# EAGLE board Schematic.old (EAGLE 8.6.0), part 1 of 3
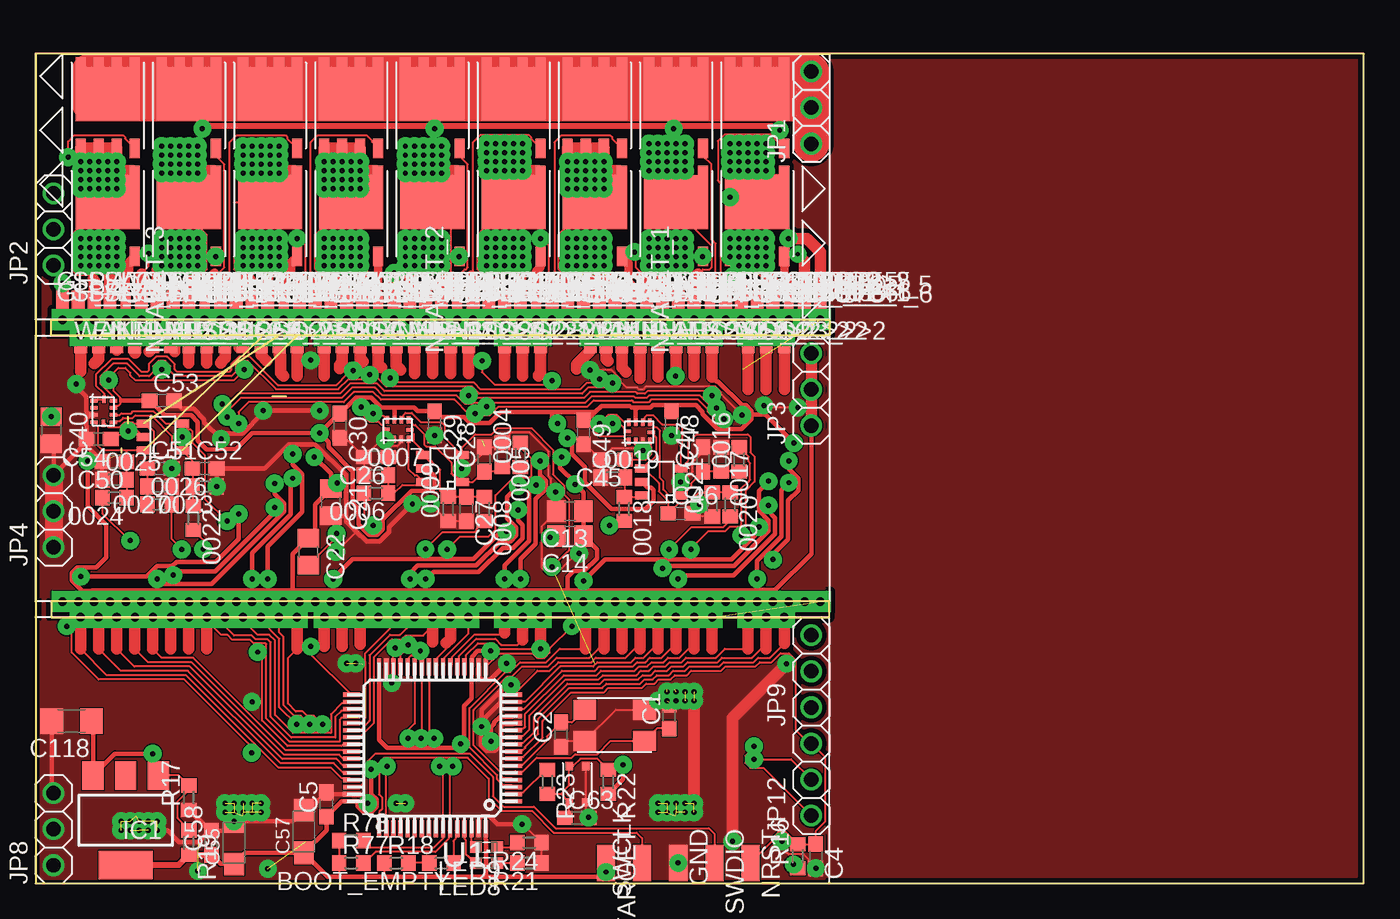
[diagram p0: board, top side]
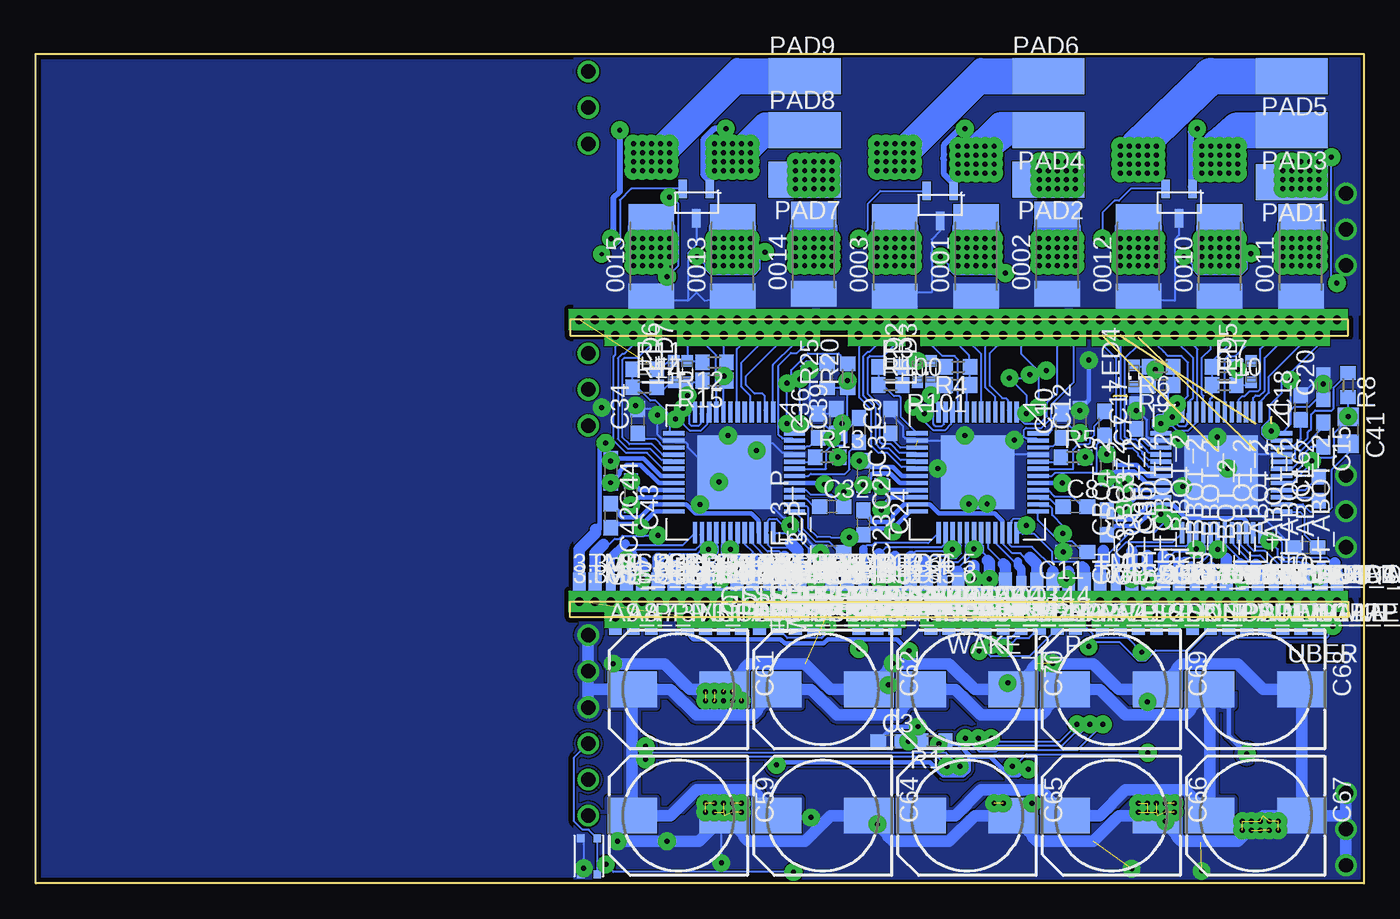
[diagram p1: board, bottom side, seen from below]

Size 93.52 x 58.41 mm. Coordinates in mm from the lower left corner, seen from the top.
Outline: 16.67,34.29 17.62,34.29
Outline: 6.03,30.64 6.03,30.32
Outline: 6.51,32.39 6.51,32.86
Outline: 0,0 93.48,0 93.52,58.4 0,58.41 0,0
Outline: 1.11,39.69 55.88,39.69 55.88,38.58 1.11,38.58 1.11,39.69
Outline: 1.11,19.84 1.11,18.73 55.88,18.73 55.88,19.84 1.11,19.84
Copper layers (1+2+15+16): Top 0.035mm / dielectric 0.2mm / Route2 0.017mm / dielectric 0.2mm / Route15 0.017mm / dielectric 0.2mm / Bottom 0.035mm
Design rules "default *": minimum track width 3.5mil, minimum drill 0.2mm, track to track 3.5mil, track to pad 3.5mil, pad to pad 3.5mil, via to via 5mil, smd to smd 3.5mil, copper to edge 6mil, drill to drill 6mil, minimum pad ring 3.5mil, minimum via ring 0.45mm, stop-mask expansion 4mil, vias tented up to drill 0mil, thermal gap 5mil
Milling: 3 lines

## Footprints (pad centres in the part's own frame; a part is rotated, then mirrored left to right if it is on the bottom)
R2512 = smd 1.8 x 3.2: 1 -2.8,0; 2 2.8,0
TP09SQ = smd 0.9 x 0.9: TP 0,0
R0603 = smd 1 x 1.1: 1 -0.85,0; 2 0.85,0
C0603 = smd 1.1 x 1: 1 -0.85,0; 2 0.85,0
C0805 = smd 1.3 x 1.5: 1 -0.95,0; 2 0.95,0
SMC_A = smd 1.6 x 1.4: + -1.5,0; - 1.5,0
150CLZ-0810 = smd 3.5 x 2.5: + 3.25,0; - -3.25,0
C1206 = smd 1.6 x 1.8: 1 -1.4,0; 2 1.4,0
TP07SQ = smd 0.7 x 0.7: TP 0,0
SMD1,27-2,54 = smd 1.27 x 2.54: 1 0,0
SOT223 = smd 1.5 x 2: 1 -2.3,-3.15; 2 0,-3.15; 3 2.3,-3.15 | smd 3.8 x 2: 4 0,3.15
1X03 = drill 1.016: 1 -2.54,0; 2 0,0; 3 2.54,0
SML0603 = smd 0.8 x 0.8: A 0.75,0; C -0.75,0
SMD2,54-5,08 = smd 2.54 x 5.08: 1 0,0
TQFP64 = smd 1.2 x 0.3: 1 -5.7,3.75; 2 -5.7,3.25; 3 -5.7,2.75; 4 -5.7,2.25; 5 -5.7,1.75; 6 -5.7,1.25; 7 -5.7,0.75; 8 -5.7,0.25; 9 -5.7,-0.25; 10 -5.7,-0.75; 11 -5.7,-1.25; 12 -5.7,-1.75; 13 -5.7,-2.25; 14 -5.7,-2.75; 15 -5.7,-3.25; 16 -5.7,-3.75; 33 5.7,-3.75; 34 5.7,-3.25; 35 5.7,-2.75; 36 5.7,-2.25; 37 5.7,-1.75; 38 5.7,-1.25; 39 5.7,-0.75; 40 5.7,-0.25; 41 5.7,0.25; 42 5.7,0.75; 43 5.7,1.25; 44 5.7,1.75; 45 5.7,2.25; 46 5.7,2.75; 47 5.7,3.25; 48 5.7,3.75 | smd 0.3 x 1.2: 17 -3.75,-5.7; 18 -3.25,-5.7; 19 -2.75,-5.7; 20 -2.25,-5.7; 21 -1.75,-5.7; 22 -1.25,-5.7; 23 -0.75,-5.7; 24 -0.25,-5.7; 25 0.25,-5.7; 26 0.75,-5.7; 27 1.25,-5.7; 28 1.75,-5.7; 29 2.25,-5.7; 30 2.75,-5.7; 31 3.25,-5.7; 32 3.75,-5.7; 49 3.75,5.7; 50 3.25,5.7; 51 2.75,5.7; 52 2.25,5.7; 53 1.75,5.7; 54 1.25,5.7; 55 0.75,5.7; 56 0.25,5.7; 57 -0.25,5.7; 58 -0.75,5.7; 59 -1.25,5.7; 60 -1.75,5.7; 61 -2.25,5.7; 62 -2.75,5.7; 63 -3.25,5.7; 64 -3.75,5.7
SUPER_DUPER_GUZICZEK = smd 0.57 x 0.55: T1 0,0; T2 2.55,0; T3 0,-1.16; T4 2.55,-1.16
S-PQFP-G48 = smd 0.3 x 1.5: 1-EN_GATE 0,0; 2-INHA 0.5,0; 3-INLA 1,0; 4-INHB 1.5,0; 5-INLB 2,0; 6-INHC 2.5,0; 7-INLC 3,0; 8-NFAULT 3.5,0; 9-NSCS 4,0; 10-SDI 4.5,0; 11-SDO 5,0; 12-SCLK 5.5,0; 25-GL_C 5.5,8.5; 26-SL_C 5,8.5; 27-SH_C 4.5,8.5; 28_GH_C 4,8.5; 29-GH_B 3.5,8.5; 30-SH_B 3,8.5; 31-SL_B 2.5,8.5; 32-GL_B 2,8.5; 33-GL_A 1.5,8.5; 34-SL_A 1,8.5; 35-SH_A 0.5,8.5; 36-GH_A 0,8.5 | smd 1.5 x 0.3: 13-PWRGD 7,1.5; 14-GND1 7,2; 15-AVDD 7,2.5; 16-SO1 7,3; 17-SO2 7,3.5; 18-SO3 7,4; 19-SN3 7,4.5; 20-SP3 7,5; 21-SN2 7,5.5; 22-SP2 7,6; 23-SN1 7,6.5; 24-SP1 7,7; 37-VCP_LSD -1.5,7; 38-VCPH -1.5,6.5; 39-CP2H -1.5,6; 40-CP2L -1.5,5.5; 41-PVDD -1.5,5; 42-CP1L -1.5,4.5; 43-CP1H -1.5,4; 44-VDRAIN -1.5,3.5; 45-GND2 -1.5,3; 46-DVDD -1.5,2.5; 47-WAKE -1.5,2; 48-VREG -1.5,1.5 | smd 5.17 x 5.17: POWERPAD 2.75,4.25
Q5B = smd 3.8 x 4.52: D1 0,-0.635 | smd 1.372 x 0.71: D2 -1.905,1.27; D3 -1.905,0; D4 -1.905,-1.27; D5 -1.905,-2.54; G 3.81,1.27; S1 3.81,0; S2 3.81,-1.27; S3 3.81,-2.54
X2QFN = smd 0.25 x 0.53: ADDR 0,0; AIN_0 1.5,0; AIN_2 1.5,1.35; AIN_3 1,1.35; GND 1,0; NC 0.5,0; SDA 0,1.35; VDD 0.5,1.35 | smd 0.53 x 0.25: AIN_1 1.6,0.65; SCL -0.1,0.7
SOT-23 = smd 1.3 x 0.6: GND 2.09,0.95; VDD 0,1.9; VOUT 0,0
SOT-23' = smd 0.55 x 1: 1 0,0; 2 0.95,0; 3 1.9,0; 4 1.9,2.7; 5 0.95,2.7; 6 0,2.7
SMD = smd 1.6 x 1.4: 1 0,2.2; 2 4.2,2.2; 3 4.2,0; 4 0,0

## Placement (x,y rotation side)
0001  5mohm  [R2512]  27.3,44.13 90 bottom
0002  5mohm  [R2512]  21.59,44.29 90 bottom
0003  5mohm  [R2512]  33.02,44.13 90 bottom
3.3V  TPTP09SQ  [TP09SQ]  47.62,37.78 0 top
3.3V1  TPTP09SQ  [TP09SQ]  55.24,40.48 0 top
3.3V2  TPTP09SQ  [TP09SQ]  55.24,20.64 0 bottom
3.3V3  TPTP09SQ  [TP09SQ]  55.24,41.28 0 top
3.3V4  TPTP09SQ  [TP09SQ]  55.24,21.43 0 bottom
3V3_P  TPTP09SQ  [TP09SQ]  47.62,17.94 0 bottom
0004  34.8kR  [R0603]  34.13,30.16 90 top
0005  4.99kR  [R0603]  32.86,30.16 270 top
0006  34.8kR  [R0603]  23.97,27.46 180 top
0007  4.99kR  [R0603]  23.97,28.73 0 top
0008  34.8kR  [R0603]  31.59,26.35 270 top
0009  4.99kR  [R0603]  29.05,26.35 90 top
0010  5mohm  [R2512]  10.16,44.13 90 bottom
0011  5mohm  [R2512]  4.45,44.13 90 bottom
0012  5mohm  [R2512]  15.88,44.13 90 bottom
0013  5mohm  [R2512]  44.45,44.13 90 bottom
0014  5mohm  [R2512]  38.73,44.29 90 bottom
0015  5mohm  [R2512]  50.16,44.13 90 bottom
0016  34.8kR  [R0603]  49.53,29.84 90 top
0017  4.99kR  [R0603]  48.26,29.84 270 top
0018  34.8kR  [R0603]  41.43,26.35 270 top
0019  4.99kR  [R0603]  40.64,28.58 0 top
0020  34.8kR  [R0603]  48.9,26.67 270 top
0021  4.99kR  [R0603]  47.62,26.67 90 top
0022  34.8kR  [R0603]  11.11,25.72 270 top
0023  4.99kR  [R0603]  11.91,27.94 180 top
0024  34.8kR  [R0603]  5.56,27.15 180 top
0025  4.99kR  [R0603]  5.56,28.42 0 top
0026  34.8kR  [R0603]  8.73,26.67 0 top
0027  4.99kR  [R0603]  8.73,27.94 180 top
A1_P  TPTP09SQ  [TP09SQ]  15.88,17.94 0 bottom
A2_P  TPTP09SQ  [TP09SQ]  17.14,17.94 0 bottom
A3_P  TPTP09SQ  [TP09SQ]  18.41,17.94 0 bottom
A4_P  TPTP09SQ  [TP09SQ]  33.02,17.94 0 bottom
A5_P  TPTP09SQ  [TP09SQ]  34.29,17.94 0 bottom
A6_P  TPTP09SQ  [TP09SQ]  35.56,17.94 0 bottom
A7_P  TPTP09SQ  [TP09SQ]  50.16,17.94 0 bottom
A8_P  TPTP09SQ  [TP09SQ]  51.44,17.94 0 bottom
A9_P  TPTP09SQ  [TP09SQ]  52.7,17.94 0 bottom
BOOT_EMPTY  0  [R0603]  28.57,1.43 180 top
C1  22pF  [C0603]  44.61,11.75 90 top
C2  22pF  [C0603]  36.99,10.48 90 top
C3  100nF  [C0603]  33.34,10 0 bottom
C4  100n  [C0603]  54.93,1.91 270 top
C5  100nF  [C0603]  20.48,5.56 90 top
C7  0.047uF  [C0603]  18.26,32.39 270 bottom
C8  0.047uF  [C0603]  20.32,26.51 0 bottom
C9  1uF/10V  [C0603]  33.34,32.54 90 bottom
C10  1uF/10V  [C0603]  21.27,32.23 90 bottom
C11  1uF/10V  [C0603]  20.32,23.34 180 bottom
C12  1uF  [C0603]  20,32.54 90 bottom
C13  4.7uF  [C0805]  37.62,26.19 180 top
C14  4.7uF  [C0805]  37.62,24.45 180 top
C15  0.047uF  [C0603]  2.86,31.59 270 bottom
C16  0.047uF  [C0603]  3.17,27.78 90 bottom
C17  1uF  [C0603]  16.03,32.86 90 bottom
C18  1uF  [C0603]  4.45,33.5 90 bottom
C19  1uF  [C0603]  4.13,23.65 180 bottom
C20  1uF  [C0603]  2.86,34.92 90 bottom
C21  4.7uF  [C0805]  20.8,26.83 270 top
C22  4.7uF  [C0805]  19.21,23.34 270 top
C23  1000pF  [C0603]  35.24,25.4 270 bottom
C24  1000pF  [C0603]  33.97,27.15 270 bottom
C25  1000pF  [C0603]  35.24,28.89 270 bottom
C26  0.1uf  [C0603]  23.97,30 180 top
C27  0.1uf  [C0603]  30.32,26.35 270 top
C28  0.1uf  [C0603]  31.59,29.84 90 top
C29  0.1uf  [C0603]  28.1,32.39 270 top
C30  0.1uf  [C0603]  21.43,32.23 270 top
C31  0.047uF  [C0603]  35.56,31.91 270 bottom
C32  0.047uF  [C0603]  37.47,26.51 0 bottom
C33  1000pF  [C0603]  18.1,25.4 270 bottom
C34  1uF  [C0603]  51.12,32.54 90 bottom
C35  1000pF  [C0603]  16.83,27.3 270 bottom
C36  1uF  [C0603]  38.42,32.23 90 bottom
C37  1000pF  [C0603]  18.1,29.37 270 bottom
C38  1uF  [C0603]  37.47,23.34 180 bottom
C39  1uF  [C0603]  37.15,32.54 90 bottom
C40  4.7uF  [C0805]  1.11,31.91 270 top
C41  4.7uF  [C0805]  1.11,31.91 270 bottom
C42  1000pF  [C0603]  53.02,25.88 270 bottom
C43  1000pF  [C0603]  51.59,27.46 270 bottom
C44  1000pF  [C0603]  53.02,29.05 270 bottom
C45  0.1uf  [C0603]  40.64,29.84 180 top
C46  0.1uf  [C0603]  45.4,26.03 0 top
C47  0.1uf  [C0603]  46.99,29.84 90 top
C48  0.1uf  [C0603]  44.77,32.39 270 top
C49  0.1uf  [C0603]  38.58,31.75 270 top
C50  0.1uf  [C0603]  5.56,29.69 180 top
C51  0.1uf  [C0603]  8.73,29.21 0 top
C52  0.1uf  [C0603]  11.91,29.21 0 top
C53  0.1uf  [C0603]  8.89,33.97 0 top
C54  0.1uf  [C0603]  4.45,31.27 180 top
C55  10uF  [SMC_A]  13.97,2.86 90 top
C57  10uF  [SMC_A]  18.89,3.65 90 top
C58  100nF  [C0603]  12.38,2.86 90 top
C59  220uf  [150CLZ-0810]  48.26,4.76 180 bottom
C61  220uf  [150CLZ-0810]  48.26,13.65 180 bottom
C62  220uf  [150CLZ-0810]  38.1,13.65 180 bottom
C63  100nF  [C0603]  38.1,4.6 0 top
C64  220uf  [150CLZ-0810]  38.1,4.76 180 bottom
C65  220uf  [150CLZ-0810]  27.94,4.76 180 bottom
C66  220uf  [150CLZ-0810]  17.78,4.76 180 bottom
C67  220uf  [150CLZ-0810]  7.62,4.76 180 bottom
C68  220uf  [150CLZ-0810]  7.62,13.65 180 bottom
C69  220uf  [150CLZ-0810]  17.78,13.65 180 bottom
C70  220uf  [150CLZ-0810]  27.94,13.65 180 bottom
C118  10uF  [C1206]  2.54,11.43 180 top
EN_GATE_MID_1  TPTP09SQ  [TP09SQ]  40.16,37.78 0 top
EN_GATE_MID_2  TPTP09SQ  [TP09SQ]  21.59,37.78 0 top
EN_GATE_MID_3  TPTP09SQ  [TP09SQ]  4.45,37.78 0 top
ENGATE_1_P  TPTP09SQ  [TP09SQ]  4.45,17.94 0 bottom
ENGATE_2_P  TPTP09SQ  [TP09SQ]  21.59,17.94 0 bottom
ENGATE_3_P  TPTP09SQ  [TP09SQ]  40.01,17.94 90 bottom
GH_ABOT_1  TPTP09SQ  [TP09SQ]  1.91,20.64 0 bottom
GH_ABOT_2  TPTP09SQ  [TP09SQ]  1.91,21.43 90 bottom
GH_ABOT_3  TPTP09SQ  [TP09SQ]  19.68,20.64 180 bottom
GH_ABOT_4  TPTP09SQ  [TP09SQ]  19.68,21.43 180 bottom
GH_ABOT_5  TPTP09SQ  [TP09SQ]  37.47,21.43 0 bottom
GH_ABOT_6  TPTP09SQ  [TP09SQ]  37.47,20.64 0 bottom
GH_ATOP_1  TPTP09SQ  [TP09SQ]  1.91,40.48 0 top
GH_ATOP_2  TPTP09SQ  [TP09SQ]  1.91,41.28 0 top
GH_ATOP_3  TPTP09SQ  [TP09SQ]  19.68,41.28 0 top
GH_ATOP_4  TPTP09SQ  [TP09SQ]  19.68,40.48 0 top
GH_ATOP_5  TPTP09SQ  [TP09SQ]  37.47,41.28 0 top
GH_ATOP_6  TPTP09SQ  [TP09SQ]  37.47,40.48 0 top
GH_BBOT_1  TPTP07SQ  [TP07SQ]  11.91,20.64 0 bottom
GH_BBOT_2  TPTP07SQ  [TP07SQ]  11.91,21.27 90 bottom
GH_BBOT_3  TPTP07SQ  [TP07SQ]  29.69,20.64 180 bottom
GH_BBOT_4  TPTP07SQ  [TP07SQ]  29.69,21.27 180 bottom
GH_BBOT_5  TPTP07SQ  [TP07SQ]  47.47,21.27 0 bottom
GH_BBOT_6  TPTP07SQ  [TP07SQ]  47.47,20.64 0 bottom
GH_BTOP_1  TPTP07SQ  [TP07SQ]  11.91,40.48 0 top
GH_BTOP_2  TPTP07SQ  [TP07SQ]  11.91,41.12 0 top
GH_BTOP_3  TPTP07SQ  [TP07SQ]  29.69,40.48 0 top
GH_BTOP_4  TPTP07SQ  [TP07SQ]  29.69,41.12 0 top
GH_BTOP_5  TPTP07SQ  [TP07SQ]  47.47,40.48 0 top
GH_BTOP_6  TPTP07SQ  [TP07SQ]  47.47,41.12 0 top
GH_CBOT_1  TPTP09SQ  [TP09SQ]  13.02,20.64 0 bottom
GH_CBOT_2  TPTP09SQ  [TP09SQ]  13.02,21.43 90 bottom
GH_CBOT_3  TPTP09SQ  [TP09SQ]  30.8,21.43 180 bottom
GH_CBOT_4  TPTP09SQ  [TP09SQ]  30.8,20.64 180 bottom
GH_CBOT_5  TPTP09SQ  [TP09SQ]  48.58,20.64 0 bottom
GH_CBOT_6  TPTP09SQ  [TP09SQ]  48.58,21.43 0 bottom
GH_CTOP_1  TPTP09SQ  [TP09SQ]  13.02,40.48 0 top
GH_CTOP_2  TPTP09SQ  [TP09SQ]  13.02,41.28 0 top
GH_CTOP_3  TPTP09SQ  [TP09SQ]  30.8,41.28 0 top
GH_CTOP_4  TPTP09SQ  [TP09SQ]  30.8,40.48 0 top
GH_CTOP_5  TPTP09SQ  [TP09SQ]  48.58,41.28 0 top
GH_CTOP_6  TPTP09SQ  [TP09SQ]  48.58,40.48 0 top
GL_ABOT_1  TPTP07SQ  [TP07SQ]  6.35,20.64 0 bottom
GL_ABOT_2  TPTP07SQ  [TP07SQ]  6.35,21.27 90 bottom
GL_ABOT_3  TPTP07SQ  [TP07SQ]  24.13,20.64 180 bottom
GL_ABOT_4  TPTP07SQ  [TP07SQ]  24.13,21.27 180 bottom
GL_ABOT_5  TPTP07SQ  [TP07SQ]  41.91,21.27 0 bottom
GL_ABOT_6  TPTP07SQ  [TP07SQ]  41.91,20.64 0 bottom
GL_ATOP_1  TPTP07SQ  [TP07SQ]  6.35,40.48 0 top
GL_ATOP_2  TPTP07SQ  [TP07SQ]  6.35,41.12 0 top
GL_ATOP_3  TPTP07SQ  [TP07SQ]  24.13,41.12 0 top
GL_ATOP_4  TPTP07SQ  [TP07SQ]  24.13,40.48 0 top
GL_ATOP_5  TPTP07SQ  [TP07SQ]  41.91,41.12 0 top
GL_ATOP_6  TPTP07SQ  [TP07SQ]  41.91,40.48 0 top
GL_BBOT_1  TPTP09SQ  [TP09SQ]  7.46,20.64 0 bottom
GL_BBOT_2  TPTP09SQ  [TP09SQ]  7.46,21.43 90 bottom
GL_BBOT_3  TPTP09SQ  [TP09SQ]  25.24,20.64 180 bottom
GL_BBOT_4  TPTP09SQ  [TP09SQ]  25.24,21.43 180 bottom
GL_BBOT_5  TPTP09SQ  [TP09SQ]  43.02,21.43 0 bottom
GL_BBOT_6  TPTP09SQ  [TP09SQ]  43.02,20.64 0 bottom
GL_BTOP_1  TPTP09SQ  [TP09SQ]  7.46,40.48 0 top
GL_BTOP_2  TPTP09SQ  [TP09SQ]  7.46,41.28 0 top
GL_BTOP_3  TPTP09SQ  [TP09SQ]  25.24,41.28 0 top
GL_BTOP_4  TPTP09SQ  [TP09SQ]  25.24,40.48 0 top
GL_BTOP_5  TPTP09SQ  [TP09SQ]  43.02,40.48 0 top
GL_BTOP_6  TPTP09SQ  [TP09SQ]  43.02,41.28 0 top
GL_CBOT_1  TPTP07SQ  [TP07SQ]  17.46,20.64 0 bottom
GL_CBOT_2  TPTP07SQ  [TP07SQ]  17.46,21.27 90 bottom
GL_CBOT_3  TPTP07SQ  [TP07SQ]  35.24,20.64 180 bottom
GL_CBOT_4  TPTP07SQ  [TP07SQ]  35.24,21.27 180 bottom
GL_CBOT_5  TPTP07SQ  [TP07SQ]  53.02,21.27 0 bottom
GL_CBOT_6  TPTP07SQ  [TP07SQ]  53.02,20.64 0 bottom
GL_CTOP_1  TPTP07SQ  [TP07SQ]  17.46,40.48 0 top
GL_CTOP_2  TPTP07SQ  [TP07SQ]  17.46,41.12 0 top
GL_CTOP_3  TPTP07SQ  [TP07SQ]  35.24,41.12 0 top
GL_CTOP_4  TPTP07SQ  [TP07SQ]  35.24,40.48 0 top
GL_CTOP_5  TPTP07SQ  [TP07SQ]  53.02,41.12 0 top
GL_CTOP_6  TPTP07SQ  [TP07SQ]  53.02,40.48 0 top
GND  WIREPADSMD1,27-254  [SMD1,27-2,54]  45.24,1.43 180 top
IC1  LM317MBSTT3  [SOT223]  6.35,4.45 180 top
INH_A_2>  TPTP09SQ  [TP09SQ]  5.71,37.78 0 top
INH_A_2>1  TPTP09SQ  [TP09SQ]  25.4,37.78 0 top
INH_A_2>2  TPTP09SQ  [TP09SQ]  41.27,37.78 0 top
INH_B_2>  TPTP09SQ  [TP09SQ]  6.99,37.78 0 top
INH_B_2>1  TPTP09SQ  [TP09SQ]  26.67,37.78 0 top
INH_B_2>2  TPTP09SQ  [TP09SQ]  42.55,37.78 0 top
INH_C_2>  TPTP09SQ  [TP09SQ]  8.26,37.78 0 top
INH_C_2>1  TPTP09SQ  [TP09SQ]  27.94,37.78 0 top
INH_C_2>2  TPTP09SQ  [TP09SQ]  43.81,37.78 0 top
JP1  [1X03]  54.61,54.61 90 top
JP2  [1X03]  1.27,46.04 90 top
JP3  [1X03]  54.61,34.77 90 top
JP4  [1X03]  1.27,26.19 90 top
JP8  [1X03]  1.27,3.81 90 top
JP9  [1X03]  54.61,14.92 90 top
JP12  [1X03]  54.61,7.3 90 top
LED2  Green  [SML0603]  31.43,36.04 90 bottom
LED3  Red  [SML0603]  30.48,36.04 90 bottom
LED4  Green  [SML0603]  16.19,35.72 90 bottom
LED5  Red  [SML0603]  7.94,36.04 90 bottom
LED6  Green  [SML0603]  48.58,36.04 90 bottom
LED7  Red  [SML0603]  47.62,36.04 90 bottom
LED8  Red  [SML0603]  31.75,1.43 180 top
LED9  Red  [SML0603]  31.75,2.54 180 top
NFAULT_1  TPTP09SQ  [TP09SQ]  45.09,37.78 90 top
NFAULT_1_P  TPTP09SQ  [TP09SQ]  9.53,17.94 0 bottom
NFAULT_2  TPTP09SQ  [TP09SQ]  29.21,37.78 90 top
NFAULT_2_P  TPTP09SQ  [TP09SQ]  29.21,17.94 0 bottom
NFAULT_3  TPTP09SQ  [TP09SQ]  9.53,37.78 90 top
NFAULT_3_P  TPTP09SQ  [TP09SQ]  45.09,17.94 0 bottom
NRST  WIREPADSMD1,27-254  [SMD1,27-2,54]  50.32,1.43 180 top
NSCS_1_P  TPTP09SQ  [TP09SQ]  10.79,17.94 0 bottom
NSCS_2>  TPTP09SQ  [TP09SQ]  10.79,37.78 0 top
NSCS_2>1  TPTP09SQ  [TP09SQ]  30.48,37.78 0 top
NSCS_2>2  TPTP09SQ  [TP09SQ]  46.35,37.78 0 top
NSCS_2_P  TPTP09SQ  [TP09SQ]  30.48,17.94 0 bottom
NSCS_3_P  TPTP09SQ  [TP09SQ]  46.35,17.94 0 bottom
PAD1  [SMD2,54-5,08]  5.08,49.37 90 bottom
PAD2  [SMD2,54-5,08]  22.23,49.53 90 bottom
PAD3  [SMD2,54-5,08]  5.08,53.02 90 bottom
PAD4  [SMD2,54-5,08]  22.23,53.02 90 bottom
PAD5  [SMD2,54-5,08]  5.08,56.83 90 bottom
PAD6  [SMD2,54-5,08]  22.23,56.83 270 bottom
PAD7  [SMD2,54-5,08]  39.37,49.53 90 bottom
PAD8  [SMD2,54-5,08]  39.37,53.02 270 bottom
PAD9  [SMD2,54-5,08]  39.37,56.83 270 bottom
PWM_1A_P  TPTP09SQ  [TP09SQ]  5.71,17.94 0 bottom
PWM_1B_P  TPTP09SQ  [TP09SQ]  6.99,17.94 0 bottom
PWM_1C_P  TPTP09SQ  [TP09SQ]  8.26,17.94 0 bottom
PWM_2A_P  TPTP09SQ  [TP09SQ]  25.4,17.94 0 bottom
PWM_2B_P  TPTP09SQ  [TP09SQ]  26.67,17.94 0 bottom
PWM_2C_P  TPTP09SQ  [TP09SQ]  27.94,17.94 0 bottom
PWM_3A_P  TPTP09SQ  [TP09SQ]  41.27,17.94 0 bottom
PWM_3B_P  TPTP09SQ  [TP09SQ]  42.55,17.94 0 bottom
PWM_3C_P  TPTP09SQ  [TP09SQ]  43.81,17.94 0 bottom
R1  180nH  [R0603]  30.32,10 180 bottom
R3  10k  [R0603]  33.34,36.35 0 bottom
R4  10k  [R0603]  28.57,36.35 180 bottom
R5  100R  [R0603]  20.48,30 0 bottom
R6  10k  [R0603]  14.29,36.35 180 bottom
R7  10k  [R0603]  9.84,36.35 0 bottom
R8  100R  [R0603]  1.11,35.08 270 bottom
R9  390  [R0603]  14.29,35.08 180 bottom
R10  390  [R0603]  9.84,35.08 0 bottom
R11  10k  [R0603]  50.64,36.19 0 bottom
R12  10k  [R0603]  45.72,36.67 180 bottom
R13  100R  [R0603]  37.78,30 0 bottom
R14  390  [R0603]  50.64,34.92 0 bottom
R15  390  [R0603]  45.72,35.4 180 bottom
R16  10k  [R0603]  53.66,1.91 90 top
R17  390  [R0603]  10.79,6.03 90 top
R18  100k  [R0603]  25.4,1.43 0 top
R19  240  [R0603]  10.79,2.86 270 top
R20  10k  [R0603]  36.35,35.72 90 bottom
R21  390  [R0603]  34.77,1.43 180 top
R22  10k  [R0603]  40.32,7.14 270 top
R23  390  [R0603]  36.04,7.14 270 top
R24  390  [R0603]  34.77,2.86 180 top
R25  10k  [R0603]  37.78,35.72 90 bottom
R77  10k  [R0603]  22.23,1.43 0 top
R78  10k  [R0603]  22.23,3.02 0 top
R100  390  [R0603]  33.34,35.08 0 bottom
R101  390  [R0603]  28.57,35.08 180 bottom
SCL_2>  TPTP09SQ  [TP09SQ]  24.13,37.78 0 top
SCL_P  TPTP09SQ  [TP09SQ]  24.13,17.94 0 bottom
SCLK_2>  TPTP09SQ  [TP09SQ]  14.61,37.78 0 top
SCLK_P  TPTP09SQ  [TP09SQ]  14.61,17.94 0 bottom
SDA_2>  TPTP09SQ  [TP09SQ]  22.86,37.78 0 top
SDA_P  TPTP09SQ  [TP09SQ]  22.86,17.94 0 bottom
SDI_2>  TPTP09SQ  [TP09SQ]  12.06,37.78 0 top
SDI_P  TPTP09SQ  [TP09SQ]  12.06,17.94 0 bottom
SDO_2>  TPTP09SQ  [TP09SQ]  13.34,37.78 0 top
SDO_P  TPTP09SQ  [TP09SQ]  13.34,17.94 0 bottom
SH_ABOT_1  TPTP09SQ  [TP09SQ]  4.13,20.64 0 bottom
SH_ABOT_2  TPTP09SQ  [TP09SQ]  4.13,21.43 90 bottom
SH_ABOT_3  TPTP09SQ  [TP09SQ]  21.91,21.43 180 bottom
SH_ABOT_4  TPTP09SQ  [TP09SQ]  21.91,20.64 180 bottom
SH_ABOT_5  TPTP09SQ  [TP09SQ]  39.69,20.64 0 bottom
SH_ABOT_6  TPTP09SQ  [TP09SQ]  39.69,21.43 0 bottom
SH_ATOP_1  TPTP09SQ  [TP09SQ]  4.13,40.48 0 top
SH_ATOP_2  TPTP09SQ  [TP09SQ]  4.13,41.28 0 top
SH_ATOP_3  TPTP09SQ  [TP09SQ]  21.91,41.28 0 top
SH_ATOP_4  TPTP09SQ  [TP09SQ]  21.91,40.48 0 top
SH_ATOP_5  TPTP09SQ  [TP09SQ]  39.69,40.48 0 top
SH_ATOP_6  TPTP09SQ  [TP09SQ]  39.69,41.28 0 top
SH_BBOT_1  TPTP09SQ  [TP09SQ]  10.79,20.64 0 bottom
SH_BBOT_2  TPTP09SQ  [TP09SQ]  10.79,21.43 90 bottom
SH_BBOT_3  TPTP09SQ  [TP09SQ]  28.57,20.64 180 bottom
SH_BBOT_4  TPTP09SQ  [TP09SQ]  28.57,21.43 180 bottom
SH_BBOT_5  TPTP09SQ  [TP09SQ]  46.35,20.64 0 bottom
SH_BBOT_6  TPTP09SQ  [TP09SQ]  46.35,21.43 0 bottom
SH_BTOP_1  TPTP09SQ  [TP09SQ]  10.79,40.48 0 top
SH_BTOP_2  TPTP09SQ  [TP09SQ]  10.79,41.28 0 top
SH_BTOP_3  TPTP09SQ  [TP09SQ]  28.57,41.28 0 top
SH_BTOP_4  TPTP09SQ  [TP09SQ]  28.57,40.48 0 top
SH_BTOP_5  TPTP09SQ  [TP09SQ]  46.35,41.28 0 top
SH_BTOP_6  TPTP09SQ  [TP09SQ]  46.35,40.48 0 top
SH_CBOT_1  TPTP09SQ  [TP09SQ]  14.13,20.64 0 bottom
SH_CBOT_2  TPTP09SQ  [TP09SQ]  14.13,21.43 90 bottom
SH_CBOT_3  TPTP09SQ  [TP09SQ]  31.91,21.43 180 bottom
SH_CBOT_4  TPTP09SQ  [TP09SQ]  31.91,20.64 180 bottom
SH_CBOT_5  TPTP09SQ  [TP09SQ]  49.69,20.64 0 bottom
SH_CBOT_6  TPTP09SQ  [TP09SQ]  49.69,21.43 0 bottom
SH_CTOP_1  TPTP09SQ  [TP09SQ]  14.13,40.48 0 top
SH_CTOP_2  TPTP09SQ  [TP09SQ]  14.13,41.28 0 top
SH_CTOP_3  TPTP09SQ  [TP09SQ]  31.91,41.28 0 top
SH_CTOP_4  TPTP09SQ  [TP09SQ]  31.91,40.48 0 top
SH_CTOP_5  TPTP09SQ  [TP09SQ]  49.69,41.28 0 top
SH_CTOP_6  TPTP09SQ  [TP09SQ]  49.69,40.48 0 top
SL_ABOT_1  TPTP09SQ  [TP09SQ]  5.24,20.64 0 bottom
SL_ABOT_2  TPTP09SQ  [TP09SQ]  5.24,21.43 90 bottom
SL_ABOT_3  TPTP09SQ  [TP09SQ]  23.02,20.64 180 bottom
SL_ABOT_4  TPTP09SQ  [TP09SQ]  23.02,21.43 180 bottom
SL_ABOT_5  TPTP09SQ  [TP09SQ]  40.8,20.64 0 bottom
SL_ABOT_6  TPTP09SQ  [TP09SQ]  40.8,21.43 0 bottom
SL_ATOP_1  TPTP09SQ  [TP09SQ]  5.24,40.48 0 top
SL_ATOP_2  TPTP09SQ  [TP09SQ]  5.24,41.28 0 top
SL_ATOP_3  TPTP09SQ  [TP09SQ]  23.02,41.28 0 top
SL_ATOP_4  TPTP09SQ  [TP09SQ]  23.02,40.48 0 top
SL_ATOP_5  TPTP09SQ  [TP09SQ]  40.8,41.28 0 top
SL_ATOP_6  TPTP09SQ  [TP09SQ]  40.8,40.48 0 top
SL_BOT_1  TPTP09SQ  [TP09SQ]  8.57,20.64 0 bottom
SL_BOT_2  TPTP09SQ  [TP09SQ]  8.57,21.43 90 bottom
SL_BOT_3  TPTP09SQ  [TP09SQ]  26.35,20.64 180 bottom
SL_BOT_4  TPTP09SQ  [TP09SQ]  26.35,21.43 180 bottom
SL_BOT_5  TPTP09SQ  [TP09SQ]  44.13,21.43 0 bottom
SL_BOT_6  TPTP09SQ  [TP09SQ]  44.13,20.64 0 bottom
SL_BTOP_1  TPTP09SQ  [TP09SQ]  8.57,40.48 0 top
SL_BTOP_2  TPTP09SQ  [TP09SQ]  8.57,41.28 0 top
SL_BTOP_3  TPTP09SQ  [TP09SQ]  26.35,40.48 0 top
SL_BTOP_4  TPTP09SQ  [TP09SQ]  26.35,41.28 0 top
SL_BTOP_5  TPTP09SQ  [TP09SQ]  44.13,40.48 0 top
SL_BTOP_6  TPTP09SQ  [TP09SQ]  44.13,41.28 0 top
SL_CBOT_1  TPTP09SQ  [TP09SQ]  16.35,20.64 0 bottom
SL_CBOT_2  TPTP09SQ  [TP09SQ]  16.35,21.43 90 bottom
SL_CBOT_3  TPTP09SQ  [TP09SQ]  34.13,20.64 180 bottom
SL_CBOT_4  TPTP09SQ  [TP09SQ]  34.13,21.43 180 bottom
SL_CBOT_5  TPTP09SQ  [TP09SQ]  51.91,20.64 0 bottom
SL_CBOT_6  TPTP09SQ  [TP09SQ]  51.91,21.43 0 bottom
SL_CTOP_1  TPTP09SQ  [TP09SQ]  16.35,40.48 0 top
SL_CTOP_2  TPTP09SQ  [TP09SQ]  16.35,41.28 0 top
SL_CTOP_3  TPTP09SQ  [TP09SQ]  34.13,41.28 0 top
SL_CTOP_4  TPTP09SQ  [TP09SQ]  34.13,40.48 0 top
SL_CTOP_5  TPTP09SQ  [TP09SQ]  51.91,41.28 0 top
SL_CTOP_6  TPTP09SQ  [TP09SQ]  51.91,40.48 0 top
SO1_2>  TPTP09SQ  [TP09SQ]  15.88,37.78 0 top
SO1_2>1  TPTP09SQ  [TP09SQ]  33.02,37.78 0 top
SO1_2>2  TPTP09SQ  [TP09SQ]  50.16,37.78 0 top
SO2_2>  TPTP09SQ  [TP09SQ]  17.14,37.78 0 top
SO2_2>1  TPTP09SQ  [TP09SQ]  34.29,37.78 0 top
SO2_2>2  TPTP09SQ  [TP09SQ]  51.44,37.78 0 top
SO3_2>  TPTP09SQ  [TP09SQ]  18.41,37.78 0 top
SO3_2>1  TPTP09SQ  [TP09SQ]  35.56,37.78 0 top
SO3_2>2  TPTP09SQ  [TP09SQ]  52.7,37.78 0 top
SP_ABOT_1  TPTP09SQ  [TP09SQ]  3.02,20.64 0 bottom
SP_ABOT_2  TPTP09SQ  [TP09SQ]  3.02,21.43 90 bottom
SP_ABOT_3  TPTP09SQ  [TP09SQ]  20.8,20.64 180 bottom
SP_ABOT_4  TPTP09SQ  [TP09SQ]  20.8,21.43 180 bottom
SP_ABOT_5  TPTP09SQ  [TP09SQ]  38.58,20.64 0 bottom
SP_ABOT_6  TPTP09SQ  [TP09SQ]  38.58,21.43 0 bottom
SP_ATOP_1  TPTP09SQ  [TP09SQ]  3.02,40.48 0 top
SP_ATOP_2  TPTP09SQ  [TP09SQ]  3.02,41.28 0 top
SP_ATOP_3  TPTP09SQ  [TP09SQ]  20.8,41.28 0 top
SP_ATOP_4  TPTP09SQ  [TP09SQ]  20.8,40.48 0 top
SP_ATOP_5  TPTP09SQ  [TP09SQ]  38.58,41.28 0 top
SP_ATOP_6  TPTP09SQ  [TP09SQ]  38.58,40.48 0 top
SP_BBOT_1  TPTP09SQ  [TP09SQ]  9.68,20.64 0 bottom
SP_BBOT_2  TPTP09SQ  [TP09SQ]  9.68,21.43 90 bottom
SP_BBOT_3  TPTP09SQ  [TP09SQ]  27.46,20.64 180 bottom
SP_BBOT_4  TPTP09SQ  [TP09SQ]  27.46,21.43 180 bottom
SP_BBOT_5  TPTP09SQ  [TP09SQ]  45.24,21.43 0 bottom
SP_BBOT_6  TPTP09SQ  [TP09SQ]  45.24,20.64 0 bottom
SP_BTOP_1  TPTP09SQ  [TP09SQ]  9.68,40.48 0 top
SP_BTOP_2  TPTP09SQ  [TP09SQ]  9.68,41.28 0 top
SP_BTOP_3  TPTP09SQ  [TP09SQ]  27.46,41.28 0 top
SP_BTOP_4  TPTP09SQ  [TP09SQ]  27.46,40.48 0 top
SP_BTOP_5  TPTP09SQ  [TP09SQ]  45.24,40.48 0 top
SP_BTOP_6  TPTP09SQ  [TP09SQ]  45.24,41.28 0 top
SP_CBOT_1  TPTP09SQ  [TP09SQ]  15.24,20.64 0 bottom
SP_CBOT_2  TPTP09SQ  [TP09SQ]  15.24,21.43 90 bottom
SP_CBOT_3  TPTP09SQ  [TP09SQ]  33.02,20.64 180 bottom
SP_CBOT_4  TPTP09SQ  [TP09SQ]  33.02,21.43 180 bottom
SP_CBOT_5  TPTP09SQ  [TP09SQ]  50.8,21.43 0 bottom
SP_CBOT_6  TPTP09SQ  [TP09SQ]  50.8,20.64 0 bottom
SP_CTOP_1  TPTP09SQ  [TP09SQ]  15.24,40.48 0 top
SP_CTOP_2  TPTP09SQ  [TP09SQ]  15.24,41.28 0 top
SP_CTOP_3  TPTP09SQ  [TP09SQ]  33.02,41.28 0 top
SP_CTOP_4  TPTP09SQ  [TP09SQ]  33.02,40.48 0 top
SP_CTOP_5  TPTP09SQ  [TP09SQ]  50.8,41.28 0 top
SP_CTOP_6  TPTP09SQ  [TP09SQ]  50.8,40.48 0 top
SWCLK  WIREPADSMD1,27-254  [SMD1,27-2,54]  42.7,1.43 0 top
SWDIO  WIREPADSMD1,27-254  [SMD1,27-2,54]  47.78,1.43 180 top
TMP_1  TPTP09SQ  [TP09SQ]  18.57,40.48 0 top
TMP_2  TPTP09SQ  [TP09SQ]  18.57,41.28 0 top
TMP_2<  TPTP09SQ  [TP09SQ]  36.35,20.64 0 bottom
TMP_2<1  TPTP09SQ  [TP09SQ]  54.13,21.43 0 bottom
TMP_2<2  TPTP09SQ  [TP09SQ]  18.57,20.64 0 bottom
TMP_2<3  TPTP09SQ  [TP09SQ]  18.57,21.43 0 bottom
TMP_2<4  TPTP09SQ  [TP09SQ]  36.35,21.43 0 bottom
TMP_2<5  TPTP09SQ  [TP09SQ]  54.13,20.64 0 bottom
TMP_2>  TPTP09SQ  [TP09SQ]  36.35,40.48 0 top
TMP_2>1  TPTP09SQ  [TP09SQ]  54.13,40.48 0 top
TMP_2>2  TPTP09SQ  [TP09SQ]  54.13,41.28 0 top
TMP_2>3  TPTP09SQ  [TP09SQ]  36.35,41.28 0 top
U1  STM32F10XRXT6  [TQFP64]  27.94,9.52 180 top
U$2  SUPER_DUPER_GUZICZEK  [SUPER_DUPER_GUZICZEK]  38.73,8.25 270 top
U$3  DRV8305  [S-PQFP-G48]  24.45,33.18 180 bottom
U$4  CSD17573Q5B  [Q5B]  28.57,55.56 270 top
U$5  CSD17573Q5B  [Q5B]  28.57,47.94 270 top
U$6  CSD17573Q5B  [Q5B]  22.86,55.56 270 top
U$7  CSD17573Q5B  [Q5B]  22.86,47.94 270 top
U$8  CSD17573Q5B  [Q5B]  34.29,55.56 270 top
U$9  CSD17573Q5B  [Q5B]  34.29,47.94 270 top
U$10  DRV8305  [S-PQFP-G48]  7.3,33.18 180 bottom
U$11  CSD17573Q5B  [Q5B]  11.43,55.56 270 top
U$12  CSD17573Q5B  [Q5B]  11.43,47.94 270 top
U$13  CSD17573Q5B  [Q5B]  5.71,55.56 270 top
U$14  CSD17573Q5B  [Q5B]  5.71,47.94 270 top
U$15  CSD17573Q5B  [Q5B]  17.14,55.56 270 top
U$16  CSD17573Q5B  [Q5B]  17.14,47.94 270 top
U$17  TLA2024  [X2QFN]  24.77,31.27 0 top
U$18  TMP235  [SOT-23]  13.97,48.89 270 bottom
U$19  TMP235  [SOT-23]  30.8,48.74 270 bottom
U$20  TPD4E001  [SOT-23']  30,28.26 90 top
U$21  DRV8305  [S-PQFP-G48]  41.59,33.18 180 bottom
U$22  CSD17573Q5B  [Q5B]  45.72,55.56 270 top
U$23  CSD17573Q5B  [Q5B]  45.72,47.94 270 top
U$24  CSD17573Q5B  [Q5B]  40.01,55.56 270 top
U$25  CSD17573Q5B  [Q5B]  40.01,47.94 270 top
U$26  CSD17573Q5B  [Q5B]  51.44,55.56 270 top
U$27  SUPER_DUPER_GUZICZEK  [SUPER_DUPER_GUZICZEK]  53.98,3.17 270 bottom
U$28  CSD17573Q5B  [Q5B]  51.44,47.94 270 top
U$29  TLA2024  [X2QFN]  41.75,31.11 0 top
U$30  TMP235  [SOT-23]  47.94,48.89 270 bottom
U$31  TPD4E001  [SOT-23']  45.4,27.3 90 top
U$32  TLA2024  [X2QFN]  4.13,33.97 270 top
U$33  TPD4E001  [SOT-23']  10.32,30.48 90 top
U$35  8MHZ  [SMD]  42.86,12.22 180 top
VDDTARGET  WIREPADSMD1,27-254  [SMD1,27-2,54]  40.16,1.43 180 top
WAKE_1  TPTP09SQ  [TP09SQ]  39.05,37.78 0 top
WAKE_1_P  TPTP09SQ  [TP09SQ]  3.17,17.94 0 bottom
WAKE_2_P  TPTP09SQ  [TP09SQ]  20.32,17.94 180 bottom
WAKE_3_P  TPTP09SQ  [TP09SQ]  38.73,17.94 90 bottom
WAKE_MID_2  TPTP09SQ  [TP09SQ]  20.32,37.78 0 top
WAKE_MID_3  TPTP09SQ  [TP09SQ]  3.17,37.78 0 top

## Library data of the parts
0001-0009 0010-0027 BOOT_EMPTY R1 R3-R25 R77 R78 R100 R101 = resistor
3.3V 3.3V1-3.3V4 3V3_P A1_P A2_P A3_P A4_P A5_P A6_P A7_P A8_P A9_P EN_GATE_MID_1-EN_GATE_MID_3 ENGATE_1_P ENGATE_2_P ENGATE_3_P GH_ABOT_1-GH_ABOT_6 GH_ATOP_1-GH_ATOP_6 GH_BBOT_1-GH_BBOT_6 GH_BTOP_1-GH_BTOP_6 GH_CBOT_1-GH_CBOT_6 GH_CTOP_1-GH_CTOP_6 GL_ABOT_1-GL_ABOT_6 GL_ATOP_1-GL_ATOP_6 GL_BBOT_1-GL_BBOT_6 GL_BTOP_1-GL_BTOP_6 GL_CBOT_1-GL_CBOT_6 GL_CTOP_1-GL_CTOP_6 INH_A_2> INH_A_2>1 INH_A_2>2 INH_B_2> INH_B_2>1 INH_B_2>2 INH_C_2> INH_C_2>1 INH_C_2>2 NFAULT_1 NFAULT_1_P NFAULT_2 NFAULT_2_P NFAULT_3 NFAULT_3_P NSCS_1_P NSCS_2> NSCS_2>1 NSCS_2>2 NSCS_2_P NSCS_3_P PWM_1A_P PWM_1B_P PWM_1C_P PWM_2A_P PWM_2B_P PWM_2C_P PWM_3A_P PWM_3B_P PWM_3C_P SCL_2> SCL_P SCLK_2> SCLK_P SDA_2> SDA_P SDI_2> SDI_P SDO_2> SDO_P SH_ABOT_1-SH_ABOT_6 SH_ATOP_1-SH_ATOP_6 SH_BBOT_1-SH_BBOT_6 SH_BTOP_1-SH_BTOP_6 SH_CBOT_1-SH_CBOT_6 SH_CTOP_1-SH_CTOP_6 SL_ABOT_1-SL_ABOT_6 SL_ATOP_1-SL_ATOP_6 SL_BOT_1-SL_BOT_6 SL_BTOP_1-SL_BTOP_6 SL_CBOT_1-SL_CBOT_6 SL_CTOP_1-SL_CTOP_6 SO1_2> SO1_2>1 SO1_2>2 SO2_2> SO2_2>1 SO2_2>2 SO3_2> SO3_2>1 SO3_2>2 SP_ABOT_1-SP_ABOT_6 SP_ATOP_1-SP_ATOP_6 SP_BBOT_1-SP_BBOT_6 SP_BTOP_1-SP_BTOP_6 SP_CBOT_1-SP_CBOT_6 SP_CTOP_1-SP_CTOP_6 TMP_1 TMP_2 TMP_2< TMP_2<1-TMP_2<5 TMP_2> TMP_2>1-TMP_2>3 WAKE_1 WAKE_1_P WAKE_2_P WAKE_3_P WAKE_MID_2 WAKE_MID_3 = testpad
C1-C5 C7-C55 C57-C59 C61-C70 C118 = rcl; SPICEPREFIX: C
GND NRST PAD1-PAD9 SWCLK SWDIO VDDTARGET = wirepad
IC1 = v-reg
JP1-JP4 JP8 JP9 JP12 = adafruit
LED2-LED9 = led
U1 = stm32
U$2 U$27 = SuperDuperGuziczek
U$3 U$10 U$21 = drv8305lbr
U$4-U$9 U$11-U$16 U$22-U$26 U$28 = CSD_Mosfet
U$17 U$29 U$32 = TLA2024
U$18 U$19 U$30 = TMP235
U$20 U$31 U$33 = tpd4e001
U$35 = cfpx-104-8mhz

## Nets
+3V3: 3.3V1.TP 3.3V2.TP 3.3V3.TP 3.3V4.TP 3.3V.TP 3V3_P.TP C5.1 C12.1 C20.1 C29.1 C30.1 C39.1 C48.1 C49.1 C53.1 C54.1 C55.+ C57.+ C58.1 IC1.4 LED2.A LED3.A LED4.A LED5.A LED6.A LED7.A R1.1 R3.2 R4.2 R6.2 R7.2 R11.2 R12.2 R16.1 R18.1 R19.2 R20.1 R22.2 R25.1 R77.1 R78.1 U1.19 U1.32 U1.48 U1.64 U$3.48-VREG U$10.48-VREG U$17.VDD U$18.VDD U$19.VDD U$20.5 U$21.48-VREG U$29.ADDR U$29.VDD U$30.VDD U$31.5 U$32.VDD U$33.5 VDDTARGET.1
A1: A1_P.TP U1.25
A2: A2_P.TP U1.26
A3: A3_P.TP U1.27
A4: A4_P.TP U1.22
A5: A5_P.TP U1.21
A6: A6_P.TP U1.20
A7: A7_P.TP U1.10
A8: A8_P.TP U1.9
A9: A9_P.TP U1.8
AIN1: 0006.1 0007.2 C26.1 U$17.AIN_0 U$20.6
AIN3: 0004.1 0005.2 C28.1 U$17.AIN_2 U$20.1
AIN5: 0016.1 0017.2 C47.1 U$29.AIN_2 U$31.1
AIN6: 0018.1 0019.2 C45.1 U$29.AIN_0 U$31.6
AIN7: 0020.1 0021.2 C46.1 U$29.AIN_1 U$31.4
AIN9: 0022.1 0023.2 C52.1 U$32.AIN_2 U$33.1
AIN10: 0024.1 0025.2 C50.1 U$32.AIN_0 U$33.6
AIN11: 0026.1 0027.2 C51.1 U$32.AIN_1 U$33.4
EN_GATE_MID_1: EN_GATE_MID_1.TP U$21.1-EN_GATE
EN_GATE_MID_2: EN_GATE_MID_2.TP U$3.1-EN_GATE
EN_GATE_MID_3: EN_GATE_MID_3.TP U$10.1-EN_GATE
ENGATE_1: ENGATE_1_P.TP U1.44
ENGATE_2: ENGATE_2_P.TP U1.28
ENGATE_3: ENGATE_3_P.TP U1.4
GH_ABOT_1: GH_ABOT_1.TP GH_ABOT_2.TP U$10.36-GH_A
GH_ABOT_2: GH_ABOT_3.TP GH_ABOT_4.TP U$3.36-GH_A
GH_ABOT_3: GH_ABOT_5.TP GH_ABOT_6.TP U$21.36-GH_A
GH_ATOP_1: GH_ATOP_1.TP GH_ATOP_2.TP U$13.G
GH_ATOP_2: GH_ATOP_5.TP GH_ATOP_6.TP U$24.G
GH_ATOP_4: GH_ATOP_3.TP GH_ATOP_4.TP U$6.G
GH_BBOT_1: GH_BBOT_1.TP GH_BBOT_2.TP U$10.29-GH_B
GH_BBOT_2: GH_BBOT_3.TP GH_BBOT_4.TP U$3.29-GH_B
GH_BBOT_3: GH_BBOT_5.TP GH_BBOT_6.TP U$21.29-GH_B
GH_BTOP_1: GH_BTOP_1.TP GH_BTOP_2.TP U$11.G
GH_BTOP_2: GH_BTOP_5.TP GH_BTOP_6.TP U$22.G
GH_BTOP_4: GH_BTOP_3.TP GH_BTOP_4.TP U$4.G
GH_C_2>: GH_CTOP_1.TP GH_CTOP_2.TP U$15.G
GH_CBOT_1: GH_CBOT_1.TP GH_CBOT_2.TP U$10.28_GH_C
GH_CBOT_2: GH_CBOT_3.TP GH_CBOT_4.TP U$3.28_GH_C
GH_CBOT_3: GH_CBOT_5.TP GH_CBOT_6.TP U$21.28_GH_C
GH_CTOP_1: GH_CTOP_5.TP GH_CTOP_6.TP U$26.G
GH_CTOP_4: GH_CTOP_3.TP GH_CTOP_4.TP U$8.G
GL_ABOT_1: GL_ABOT_1.TP GL_ABOT_2.TP U$10.33-GL_A
GL_ABOT_2: GL_ABOT_3.TP GL_ABOT_4.TP U$3.33-GL_A
GL_ABOT_3: GL_ABOT_5.TP GL_ABOT_6.TP U$21.33-GL_A
GL_ATOP_1: GL_ATOP_1.TP GL_ATOP_2.TP U$14.G
GL_ATOP_2: GL_ATOP_5.TP GL_ATOP_6.TP U$25.G
GL_ATOP_4: GL_ATOP_3.TP GL_ATOP_4.TP U$7.G
GL_BBOT_1: GL_BBOT_1.TP GL_BBOT_2.TP U$10.32-GL_B
GL_BBOT_2: GL_BBOT_3.TP GL_BBOT_4.TP U$3.32-GL_B
GL_BBOT_3: GL_BBOT_5.TP GL_BBOT_6.TP U$21.32-GL_B
GL_BTOP_1: GL_BTOP_1.TP GL_BTOP_2.TP U$12.G
GL_BTOP_2: GL_BTOP_5.TP GL_BTOP_6.TP U$23.G
GL_BTOP_4: GL_BTOP_3.TP GL_BTOP_4.TP U$5.G
GL_CBOT_1: GL_CBOT_1.TP GL_CBOT_2.TP U$10.25-GL_C
GL_CBOT_2: GL_CBOT_3.TP GL_CBOT_4.TP U$3.25-GL_C
GL_CBOT_3: GL_CBOT_5.TP GL_CBOT_6.TP U$21.25-GL_C
GL_CTOP_1: GL_CTOP_5.TP GL_CTOP_6.TP U$28.G
GL_CTOP_4: GL_CTOP_3.TP GL_CTOP_4.TP U$9.G
GND: 0005.1 0007.1 0009.1 0017.1 0019.1 0021.1 0023.1 0025.1 0027.1 C1.2 C2.1 C3.1 C4.2 C5.2 C9.2 C10.2 C11.2 C12.2 C13.2 C17.2 C18.2 C19.2 C20.2 C21.2 C26.2 C27.2 C28.2 C29.2 C30.2 C34.2 C36.2 C38.2 C39.2 C40.2 C45.2 C46.2 C47.2 C48.2 C49.2 C50.2 C51.2 C52.2 C53.2 C54.2 C55.- C57.- C58.2 C59.- C61.- C62.- C63.2 C64.- C65.- C66.- C67.- C68.- C69.- C70.- C118.2 GND.1 JP4.1 JP4.2 JP4.3 JP8.1 JP8.2 JP8.3 R17.1 R21.1 R24.1 U1.12 U1.18 U1.31 U1.47 U1.63 U$2.T1 U$2.T2 U$3.14-GND1 U$3.45-GND2 U$3.POWERPAD U$10.14-GND1 U$10.45-GND2 U$10.POWERPAD U$17.ADDR U$17.GND U$20.2 U$21.14-GND1 U$21.45-GND2 U$21.POWERPAD U$27.T3 U$27.T4 U$29.GND U$31.2 U$32.GND U$33.2 U$35.2 U$35.4
GND_TOP: 0001.1 0002.1 0003.1 0010.1 0011.1 0012.1 0013.1 0014.1 0015.1 JP2.1 JP2.2 JP2.3 SP_ATOP_1.TP SP_ATOP_2.TP SP_ATOP_3.TP SP_ATOP_4.TP SP_ATOP_5.TP SP_ATOP_6.TP SP_BTOP_1.TP SP_BTOP_2.TP SP_BTOP_3.TP SP_BTOP_4.TP SP_BTOP_5.TP SP_BTOP_6.TP SP_CTOP_1.TP SP_CTOP_2.TP SP_CTOP_3.TP SP_CTOP_4.TP SP_CTOP_5.TP SP_CTOP_6.TP U$18.GND U$19.GND U$30.GND
INH_A_2>: INH_A_2>.TP U$10.2-INHA
INH_A_2>1: INH_A_2>1.TP U$3.2-INHA
INH_A_2>2: INH_A_2>2.TP U$21.2-INHA
INH_B_2>: INH_B_2>.TP U$10.4-INHB
INH_B_2>1: INH_B_2>1.TP U$3.4-INHB
INH_B_2>2: INH_B_2>2.TP U$21.4-INHB
INH_C_2>: INH_C_2>.TP U$10.6-INHC
INH_C_2>1: INH_C_2>1.TP U$3.6-INHC
INH_C_2>2: INH_C_2>2.TP U$21.6-INHC
N$1: C10.1 U$3.46-DVDD
N$2: C9.1 U$3.15-AVDD
N$3: LED8.C R21.2
N$4: C11.1 U$3.37-VCP_LSD
N$5: C7.2 U$3.42-CP1L
N$6: C7.1 U$3.43-CP1H
N$7: C8.2 U$3.40-CP2L
N$8: C8.1 U$3.39-CP2H
N$9: R5.1 U$3.44-VDRAIN
N$10: C36.1 U$21.46-DVDD
N$11: C22.2 U$3.38-VCPH
N$12: C34.1 U$21.15-AVDD
N$13: C38.1 U$21.37-VCP_LSD
N$14: C31.2 U$21.42-CP1L
N$15: LED2.C R100.2
N$16: C31.1 U$21.43-CP1H
N$17: LED3.C R101.2
N$18: LED4.C R9.2
N$19: LED5.C R10.2
N$20: C32.2 U$21.40-CP2L
N$21: C32.1 U$21.39-CP2H
N$22: R13.1 U$21.44-VDRAIN
N$23: C14.2 U$21.38-VCPH
N$24: LED6.C R14.2
N$25: LED7.C R15.2
N$26: TMP_2<2.TP TMP_2<3.TP U$32.AIN_3 U$33.3
N$27: TMP_2<4.TP TMP_2<.TP U$17.AIN_3 U$20.3
N$28: 0008.1 0009.2 C27.1 U$17.AIN_1 U$20.4
N$29: R23.1 U1.2
N$30: TMP_2<1.TP TMP_2<5.TP U$29.AIN_3 U$31.3
N$31: LED8.A U1.61
N$32: SWCLK.1 U1.49
N$33: SWDIO.1 U1.46
N$34: LED9.A U1.62
N$36: BOOT_EMPTY.2 R18.2
N$37: BOOT_EMPTY.1 U1.60
N$45: C3.2 R1.2 U1.13
N$58: C18.1 U$10.46-DVDD
N$59: C17.1 U$10.15-AVDD
N$60: C19.1 U$10.37-VCP_LSD
N$61: C15.2 U$10.42-CP1L
N$62: C15.1 U$10.43-CP1H
N$63: C16.2 U$10.40-CP2L
N$64: C16.1 U$10.39-CP2H
N$77: GL_CTOP_1.TP GL_CTOP_2.TP U$16.G
N$78: IC1.1 R17.2 R19.1
N$79: C63.1 R22.1 R23.2 U$2.T3 U$2.T4
N$81: LED9.C R24.2
N$82: R8.1 U$10.44-VDRAIN
N$83: C41.2 U$10.38-VCPH
NFAULT: NFAULT_3.TP R7.1 R10.1 U$10.8-NFAULT
NFAULT1: NFAULT_2.TP R4.1 R101.1 U$3.8-NFAULT
NFAULT2: NFAULT_1.TP R12.1 R15.1 U$21.8-NFAULT
NFAULT_1: NFAULT_1_P.TP U1.50
NFAULT_2: NFAULT_2_P.TP U1.24
NFAULT_3: NFAULT_3_P.TP U1.14
NRST: C4.1 JP12.3 NRST.1 R16.2 U1.7 U$27.T1 U$27.T2
NSCS_1: NSCS_1_P.TP U1.33
NSCS_2: NSCS_2_P.TP U1.23
NSCS_2>: NSCS_2>.TP U$10.9-NSCS
NSCS_2>1: NSCS_2>1.TP U$3.9-NSCS
NSCS_2>2: NSCS_2>2.TP U$21.9-NSCS
NSCS_3: NSCS_3_P.TP U1.11
OSC1: C1.1 U1.5 U$35.1
OSC2: C2.2 U1.6 U$35.3
PWM_1A: PWM_1A_P.TP U1.43
PWM_1B: PWM_1B_P.TP U1.42
PWM_1C: PWM_1C_P.TP U1.41
PWM_2A: PWM_2A_P.TP U1.37
PWM_2B: PWM_2B_P.TP U1.38
PWM_2C: PWM_2C_P.TP U1.39
PWM_3A: PWM_3A_P.TP U1.17
PWM_3B: PWM_3B_P.TP U1.16
PWM_3C: PWM_3C_P.TP U1.15
PWRGD: R6.1 R9.1 U$10.13-PWRGD
PWRGD1: R3.1 R100.1 U$3.13-PWRGD
PWRGD2: R11.1 R14.1 U$21.13-PWRGD
SCL: SCL_P.TP U1.29
SCL_2>: R20.2 SCL_2>.TP U$17.SCL U$29.SCL U$32.ADDR U$32.SCL
SCL_DRIVER: JP12.1 R78.2 U1.58
SCLK: SCLK_P.TP U1.34
SCLK_2>: SCLK_2>.TP U$3.12-SCLK U$10.12-SCLK U$21.12-SCLK
SDA: SDA_P.TP U1.30
SDA_2>: R25.2 SDA_2>.TP U$17.SDA U$29.SDA U$32.SDA
SDA_DRIVER: JP12.2 R77.2 U1.59
SDI: SDI_P.TP U1.36
SDI_2>: SDI_2>.TP U$3.10-SDI U$10.10-SDI U$21.10-SDI
SDO: SDO_P.TP U1.35
SDO_2>: SDO_2>.TP U$3.11-SDO U$10.11-SDO U$21.11-SDO
SH_ABOT_1: 0024.2 SH_ABOT_1.TP SH_ABOT_2.TP U$10.35-SH_A
SH_ABOT_2: 0006.2 SH_ABOT_3.TP SH_ABOT_4.TP U$3.35-SH_A
SH_ABOT_3: 0018.2 SH_ABOT_5.TP SH_ABOT_6.TP U$21.35-SH_A
SH_ATOP_1: PAD1.1 SH_ATOP_1.TP SH_ATOP_2.TP U$13.S1 U$13.S2 U$13.S3 U$14.D1 U$14.D2 U$14.D3 U$14.D4 U$14.D5
SH_ATOP_2: PAD7.1 SH_ATOP_5.TP SH_ATOP_6.TP U$24.S1 U$24.S2 U$24.S3 U$25.D1 U$25.D2 U$25.D3 U$25.D4 U$25.D5
SH_ATOP_4: PAD2.1 SH_ATOP_3.TP SH_ATOP_4.TP U$6.S1 U$6.S2 U$6.S3 U$7.D1 U$7.D2 U$7.D3 U$7.D4 U$7.D5
SH_BBOT_1: 0026.2 SH_BBOT_1.TP SH_BBOT_2.TP U$10.30-SH_B
SH_BBOT_2: 0008.2 SH_BBOT_3.TP SH_BBOT_4.TP U$3.30-SH_B
SH_BBOT_3: 0020.2 SH_BBOT_5.TP SH_BBOT_6.TP U$21.30-SH_B
SH_BTOP_1: PAD3.1 SH_BTOP_1.TP SH_BTOP_2.TP U$11.S1 U$11.S2 U$11.S3 U$12.D1 U$12.D2 U$12.D3 U$12.D4 U$12.D5
SH_BTOP_2: PAD8.1 SH_BTOP_5.TP SH_BTOP_6.TP U$22.S1 U$22.S2 U$22.S3 U$23.D1 U$23.D2 U$23.D3 U$23.D4 U$23.D5
SH_BTOP_4: PAD4.1 SH_BTOP_3.TP SH_BTOP_4.TP U$4.S1 U$4.S2 U$4.S3 U$5.D1 U$5.D2 U$5.D3 U$5.D4 U$5.D5
SH_C_2>: PAD5.1 SH_CTOP_1.TP SH_CTOP_2.TP U$15.S1 U$15.S2 U$15.S3 U$16.D1 U$16.D2 U$16.D3 U$16.D4 U$16.D5
SH_CBOT_1: 0022.2 SH_CBOT_1.TP SH_CBOT_2.TP U$10.27-SH_C
SH_CBOT_2: 0004.2 SH_CBOT_3.TP SH_CBOT_4.TP U$3.27-SH_C
SH_CBOT_3: 0016.2 SH_CBOT_5.TP SH_CBOT_6.TP U$21.27-SH_C
SH_CTOP_1: PAD9.1 SH_CTOP_5.TP SH_CTOP_6.TP U$26.S1 U$26.S2 U$26.S3 U$28.D1 U$28.D2 U$28.D3 U$28.D4 U$28.D5
SH_CTOP_4: PAD6.1 SH_CTOP_3.TP SH_CTOP_4.TP U$8.S1 U$8.S2 U$8.S3 U$9.D1 U$9.D2 U$9.D3 U$9.D4 U$9.D5
SL_ABOT_1: C33.1 SL_ABOT_1.TP SL_ABOT_2.TP U$10.23-SN1 U$10.34-SL_A
SL_ABOT_2: C23.1 SL_ABOT_3.TP SL_ABOT_4.TP U$3.23-SN1 U$3.34-SL_A
SL_ABOT_3: C42.1 SL_ABOT_5.TP SL_ABOT_6.TP U$21.23-SN1 U$21.34-SL_A
SL_ATOP_1: 0011.2 SL_ATOP_1.TP SL_ATOP_2.TP U$14.S1 U$14.S2 U$14.S3
SL_ATOP_2: 0014.2 SL_ATOP_5.TP SL_ATOP_6.TP U$25.S1 U$25.S2 U$25.S3
SL_ATOP_4: 0002.2 SL_ATOP_3.TP SL_ATOP_4.TP U$7.S1 U$7.S2 U$7.S3
SL_BOT_1: C35.1 SL_BOT_1.TP SL_BOT_2.TP U$10.21-SN2 U$10.31-SL_B
SL_BOT_2: C24.1 SL_BOT_3.TP SL_BOT_4.TP U$3.21-SN2 U$3.31-SL_B
SL_BOT_3: C43.1 SL_BOT_5.TP SL_BOT_6.TP U$21.21-SN2 U$21.31-SL_B
SL_BTOP_1: 0010.2 SL_BTOP_1.TP SL_BTOP_2.TP U$12.S1 U$12.S2 U$12.S3
SL_BTOP_2: 0013.2 SL_BTOP_5.TP SL_BTOP_6.TP U$23.S1 U$23.S2 U$23.S3
SL_BTOP_4: 0001.2 SL_BTOP_3.TP SL_BTOP_4.TP U$5.S1 U$5.S2 U$5.S3
SL_C_2<2: C44.1 SL_CBOT_5.TP SL_CBOT_6.TP U$21.19-SN3 U$21.26-SL_C
SL_C_2>: 0012.2 SL_CTOP_1.TP SL_CTOP_2.TP U$16.S1 U$16.S2 U$16.S3
SL_CBOT_1: C37.1 SL_CBOT_1.TP SL_CBOT_2.TP U$10.19-SN3 U$10.26-SL_C
SL_CBOT_2: C25.1 SL_CBOT_3.TP SL_CBOT_4.TP U$3.19-SN3 U$3.26-SL_C
SL_CTOP_1: 0015.2 SL_CTOP_5.TP SL_CTOP_6.TP U$28.S1 U$28.S2 U$28.S3
SL_CTOP_4: 0003.2 SL_CTOP_3.TP SL_CTOP_4.TP U$9.S1 U$9.S2 U$9.S3
SO1_2>: SO1_2>.TP U$10.16-SO1
SO1_2>1: SO1_2>1.TP U$3.16-SO1
SO1_2>2: SO1_2>2.TP U$21.16-SO1
SO2_2>: SO2_2>.TP U$10.17-SO2
SO2_2>1: SO2_2>1.TP U$3.17-SO2
SO2_2>2: SO2_2>2.TP U$21.17-SO2
SO3_2>: SO3_2>.TP U$10.18-SO3
SO3_2>1: SO3_2>1.TP U$3.18-SO3
SO3_2>2: SO3_2>2.TP U$21.18-SO3
SP_ABOT_1: C33.2 SP_ABOT_1.TP SP_ABOT_2.TP U$10.24-SP1
SP_ABOT_2: C23.2 SP_ABOT_3.TP SP_ABOT_4.TP U$3.24-SP1
SP_ABOT_3: C42.2 SP_ABOT_5.TP SP_ABOT_6.TP U$21.24-SP1
SP_BBOT_1: C35.2 SP_BBOT_1.TP SP_BBOT_2.TP U$10.22-SP2
SP_BBOT_2: C24.2 SP_BBOT_3.TP SP_BBOT_4.TP U$3.22-SP2
SP_BBOT_3: C43.2 SP_BBOT_5.TP SP_BBOT_6.TP U$21.22-SP2
SP_CBOT_1: C37.2 SP_CBOT_1.TP SP_CBOT_2.TP U$10.20-SP3
SP_CBOT_2: C25.2 SP_CBOT_3.TP SP_CBOT_4.TP U$3.20-SP3
SP_CBOT_3: C44.2 SP_CBOT_5.TP SP_CBOT_6.TP U$21.20-SP3
TMP_1: TMP_1.TP TMP_2.TP U$18.VOUT
TMP_2>: TMP_2>3.TP TMP_2>.TP U$19.VOUT
TMP_2>1: TMP_2>1.TP TMP_2>2.TP U$30.VOUT
VBAT: U1.1
VMOTOR: C13.1 C14.1 C21.1 C22.1 C40.1 C41.1 JP3.1 JP3.2 JP3.3 R5.2 R8.2 R13.2 U$3.41-PVDD U$10.41-PVDD U$21.41-PVDD
VMOTOR_BOTTOM: C59.+ C61.+ C62.+ C64.+ C65.+ C66.+ C67.+ C68.+ C69.+ C70.+ C118.1 IC1.3 JP9.1 JP9.2 JP9.3
VMOTOR_TOP: JP1.1 JP1.2 JP1.3 U$4.D1 U$4.D2 U$4.D3 U$4.D4 U$4.D5 U$6.D1 U$6.D2 U$6.D3 U$6.D4 U$6.D5 U$8.D1 U$8.D2 U$8.D3 U$8.D4 U$8.D5 U$11.D1 U$11.D2 U$11.D3 U$11.D4 U$11.D5 U$13.D1 U$13.D2 U$13.D3 U$13.D4 U$13.D5 U$15.D1 U$15.D2 U$15.D3 U$15.D4 U$15.D5 U$22.D1 U$22.D2 U$22.D3 U$22.D4 U$22.D5 U$24.D1 U$24.D2 U$24.D3 U$24.D4 U$24.D5 U$26.D1 U$26.D2 U$26.D3 U$26.D4 U$26.D5
WAKE_1: U1.45 WAKE_1_P.TP
WAKE_2: U1.40 WAKE_2_P.TP
WAKE_3: U1.3 WAKE_3_P.TP
WAKE_MID_1: U$21.47-WAKE WAKE_1.TP
WAKE_MID_2: U$3.47-WAKE WAKE_MID_2.TP
WAKE_MID_3: U$10.47-WAKE WAKE_MID_3.TP

## Tracks (layer width: path | path; a pad name or v marks a point on that pad's centre or on a via)
+3V3  (via drill 0.35, 0.6)  (2 unrouted)
  Top 0.152: v8.89,36.16 8.13,35.4 | 8.13,35.4 7.05,35.4 6.68,35.77 6.68,35.93 6.33,36.28 5.82,36.28 5.17,35.62 v5.17,35.43 5.48,35.11 5.48,34.69 5.97,34.19 5.97,33.9 | v14.7,36.16 13.93,35.4 8.13,35.4 | LED2.A 31.43,35.99 32.33,35.08 36.04,35.08 36.34,35.39 v36.35,35.39 | 10.74,1.96 R19.2 | 5.56,33.55 U$32.VDD 5.62,33.62 5.84,33.62 5.97,33.75 5.97,33.9 | U$33.5 7.19,31.86 v6.54,31.86 6.25,31.57 5.59,31.57 C54.1 | 3.3V3.TP 55.24,40.64 3.3V1.TP v55.24,39.69 | U$29.ADDR 41.41,31.46 39.74,31.46 38.96,32.24 38.46,32.24 38.58,32.36 C49.1 | C48.1 44.77,33.67 | R18.1 24.55,0.53 24.61,0.48 | R78.1 R77.1 21.38,0.58 21.27,0.48 | VDDTARGET.1 v40.16,0.79 | v53.37,1.33 53.64,1.06 R16.1 | 47.62,18.1 v47.62,18.73 | 6.05,33.97 5.97,33.9 | v47.62,38.58 3.3V.TP | 26.64,33.5 26.57,33.42 26.04,33.42
  Top 0.305: 47.62,35.64 47.93,35.34 48.03,35.34 49.72,33.66 50.01,33.66 50.41,33.26 50.41,33.02 | 6.05,33.97 C53.1 8.39,33.62 8.44,33.62 9.11,32.96 10.95,32.96 11.43,32.48 11.43,31.16 12.05,30.54 12.86,30.54 12.91,30.59 14.13,30.59 15.23,31.69 C12.1 | C12.1 21.39,33.08 C30.1 22.56,34.21 23.62,34.21 24.33,33.5 25.4,33.5 | U$20.5 27.67,28.84 27.93,28.84 28.11,28.66 28.11,27.86 27.88,27.62 26.46,27.62 24.45,25.61 24.45,24.91 24.05,24.51 23.48,24.51 22.74,25.25 22.74,26.36 22.32,26.79 22.32,29.01 20.63,30.7 20.63,31.07 C12.1 | 38.46,32.24 39.4,33.18 | 42.39,33.48 41.95,33.48 41.82,33.61 39.83,33.61 39.4,33.18 | 42.39,33.48 43.3,33.48 43.48,33.67 44.77,33.67 46.49,33.67 46.95,33.2 46.95,33.04 48,31.99 49.71,31.99 50.41,32.7 50.41,33.02 | U$29.VDD 42.25,33.35 42.39,33.48 | 36.35,33.18 32.75,33.18 31.97,32.4 30.61,32.4 30.17,32.84 28.5,32.84 C29.1 26.91,33.24 26.64,33.5 25.4,33.5 | 36.35,33.18 39.4,33.18 | U$31.5 43.07,27.88 43.33,27.88 43.51,27.71 43.51,26.9 42.96,26.35 40.53,26.35 38.67,28.22 38.67,29.33 37.77,30.22 37.77,31.07 37.5,31.34 v37.44,31.34 | 50.41,33.02 51.37,33.02 v53.39,31 | U$17.VDD 25.27,33.36 25.4,33.5 | C57.+ 14.76,2.15 C55.+ 13.03,1.36 C58.1 | C57.+ 20.48,3.74 C5.1 21.55,5.77 U1.48 | C57.+ 20.57,0.48 21.27,0.48 24.61,0.48 31.75,0.48 | 31.75,0.48 40.16,0.48 40.32,0.63 v40.16,0.79 | U1.64 31.69,3.08 31.7,3.07 31.7,0.52 31.75,0.48 | U1.32 24.19,10.1 24.77,9.52 29.66,9.52 v29.93,9.8 30.16,10.03 30.16,12.48 30.69,13.01 U1.19 30.73,15.27 30.73,15.95 31.13,16.35 v32.03,16.35 | v23.62,8.02 23.62,6.27 24,5.9 24,5.37 23.63,5 23.11,5 22.69,5.42 22.69,5.77 U1.48
  Top 0.305: R22.2 41.35,7.32 v41.35,8.33 | 36.35,33.18 36.35,32.74 v36.73,32.36 | U1.48
  Top 0.406: IC1.4 10.08,1.3 10.74,1.96 | R19.2 C58.1 | v52.39,53.02 52.14,53.02 51.86,53.3 44.75,53.3 | v44.93,53.13 44.75,53.3 | 44.75,53.3 28.27,53.3 v28.1,53.13 27.92,53.3 11.92,53.3 v11.75,53.13
  Top 0.813: 3.3V.TP 47.62,35.64 | v52.99,45.4 53.02,45.38 54.32,45.38 55.24,44.45 55.24,40.64 | 47.62,16.51 47.62,18.1
  Bottom 0.152: R4.2 29.54,36.79 LED3.A LED2.A 31.86,36.35 R3.2 | R11.2 48.88,36.79 LED6.A LED7.A | LED7.A 46.69,36.79 R12.2 | R6.2 15.44,36.35 | LED5.A 8.37,36.35 R7.2 8.89,36.25 v8.89,36.16 | 5.17,33.29 5.17,32.31 U$10.48-VREG 5.98,31.86 v6.54,31.86 | 5.17,33.29 5.17,34.99 5.17,35 v5.17,35.43 | R6.2 14.82,36.29 v14.7,36.16 | C12.1 20.22,31.69 20.68,32.15 21.87,32.15 22,32.02 22,31.91 22.23,31.68 U$3.48-VREG | 39.65,31.68 U$21.48-VREG 40.08,31.69 39.47,31.69 39.01,32.15 37.82,32.15 37.36,31.69 C39.1 37.15,31.95 37.15,32.02 36.35,32.81 R20.1 | R20.1 v36.35,35.39 | v40.16,0.79 52.83,0.79 v53.37,1.33 | 54.08,24.67 53.83,24.92 | v55.24,19.84 3.3V2.TP 3.3V4.TP | v47.62,18.73 3V3_P.TP | 5.17,33.29 4.9,33.57 3.85,33.57 3.34,34.08 C20.1 | R6.2 16.08,36.35 LED4.A | v47.62,38.58 LED7.A | R20.1 R25.1
  Bottom 0.305: 53.83,24.92 53.83,30.58 53.65,30.76 53.64,30.76 v53.39,31 53.28,31.11 | 27.66,8.92 28.54,9.8 v29.93,9.8 29.67,9.8 R1.1 | v23.62,8.02 23.92,8.02 24.34,7.6 24.87,7.6 25,7.6 26.31,8.92 27.66,8.92 | v41.35,8.33 41.18,8.51 30.54,8.51 29.63,7.6 28.2,7.6 27.83,7.97 27.83,8.74 27.66,8.92 | v32.03,16.35 32.86,17.18 37.73,17.18 38.03,16.88 40.75,16.88 41.06,17.18 47.19,17.18 47.62,17.62 3V3_P.TP | v36.73,32.36 37.15,31.95 | v37.44,31.34 37.15,31.63 C39.1
  Bottom 0.406: U$18.VDD 12.19,49.02 12.19,52.89 11.98,52.89 v11.75,53.13 | U$30.VDD 46.04,49.41 46.48,49.85 46.48,52.39 45.74,53.13 v44.93,53.13 | U$19.VDD 28.9,49.25 29.57,49.92 29.57,50.92 29.6,50.96 29.57,51.32 29.57,52 28.54,53.02 28.2,53.02 v28.1,53.13 | v52.99,45.4 52.82,45.58 52.82,48.28 52.39,48.71 v52.39,53.02
  Bottom 0.813: 3.3V4.TP 55.24,23.51 54.08,24.67 54.08,24.92
  other vias: 31.43,36.79 20,31.69
A1  (via drill 0.35, 0.6)
  Top 0.152: U1.25 27.69,10.57 v28.05,10.21 | v18.38,11.19 17.16,12.4 17.16,17.22 15.88,18.51 v15.88,18.73
  Bottom 0.152: v28.05,10.21 28,10.21 27.09,9.3 25.86,9.3 25.77,9.39 20.17,9.39 v18.38,11.19 | v15.88,18.73 A1_P.TP
A2  (via drill 0.35, 0.6)
  Top 0.152: v27.15,10.21 27.19,10.25 U1.26 | v19.29,11.19 18.68,11.79 18.2,11.79 17.47,12.53 17.47,17.35 17.14,17.67 v17.14,18.73
  Bottom 0.152: v27.15,10.21 27.1,10.21 26.49,9.6 25.99,9.6 25.89,9.7 21.23,9.7 20.35,10.58 19.94,10.58 19.34,11.19 v19.29,11.19 | v17.14,18.73 A2_P.TP
A3  (via drill 0.35, 0.6)
  Top 0.152: U1.27 26.69,11.24 26.24,10.79 v26.24,10.21 | v20.2,11.19 19.59,11.79 19.11,11.79 18.81,12.1 18.33,12.1 17.77,12.65 17.77,15.87 18.41,16.51 | v18.41,18.73 18.41,18.1
  Top 0.813: 18.41,18.1 18.41,16.51
  Bottom 0.152: v26.24,10.21 26.03,10 21.36,10 20.2,11.16 v20.2,11.19 | v18.41,18.73 A3_P.TP
A4  (via drill 0.6)
  Top 0.152: v33.02,18.73 33.02,18.1 33.02,17.9 32.63,17.51 30.9,17.51 29.31,15.93 29.31,15.35 U1.22
  Top 0.813: 33.02,18.1 33.02,17.62
  Bottom 0.152: v33.02,18.73 A4_P.TP
A5  (via drill 0.6)
  Top 0.152: 34.29,17.14 33.95,16.8 32.79,16.8 32.38,17.21 31.02,17.21 29.81,16 29.81,15.35 U1.21 | 34.29,18.1 v34.29,18.73
  Top 0.813: 34.29,17.14 34.29,18.1
  Bottom 0.152: v34.29,18.73 A5_P.TP
A6  (via drill 0.35, 0.6)
  Top 0.152: v35.56,16.51 35.4,16.51 | 35.4,16.51 35.24,16.51 35.23,16.5 | U1.20 30.31,15.34 30.31,16.06 31.15,16.9 32.26,16.9 32.66,16.5 35.39,16.5 35.4,16.51 | v35.56,18.73 35.56,18.1
  Top 0.813: v35.56,16.51 35.56,18.1
  Bottom 0.152: 35.56,18.43 A6_P.TP v35.56,18.73
A7  (via drill 0.6)
  Top 0.152: 50.16,16.51 48.52,16.51 47.89,15.88 45.78,15.88 45.47,15.57 44.63,15.57 44.33,15.27 43.49,15.27 43.19,14.96 42.61,14.96 42.3,14.66 39.93,14.66 39.63,14.35 37.32,14.35 34.77,11.81 34.77,10.84 34.34,10.4 33.76,10.4 U1.10 | 50.16,18.1 v50.16,18.73
  Top 0.813: 50.16,16.51 50.16,18.1
  Bottom 0.152: v50.16,18.73 A7_P.TP
A8  (via drill 0.6)
  Top 0.152: U1.9 33.76,9.9 34.34,9.9 35.08,10.64 35.08,10.71 35.08,11.69 37.44,14.05 39.76,14.05 40.06,14.35 42.43,14.35 42.73,14.66 43.31,14.66 43.62,14.96 44.46,14.96 44.76,15.27 45.6,15.27 45.91,15.57 48.01,15.57 48.32,15.88 50.43,15.88 51.38,16.83 51.44,16.83 | 51.44,18.1 v51.44,18.73
  Top 0.813: 51.44,16.51 51.44,16.83 51.44,18.1
  Bottom 0.152: v51.44,18.73 A8_P.TP
A9  (via drill 0.6)
  Top 0.152: U1.8 34.21,9.27 34.47,9.53 34.47,9.6 35.39,10.52 35.39,11.56 37.57,13.74 39.88,13.74 40.19,14.05 42.55,14.05 42.86,14.35 43.44,14.35 43.74,14.66 44.58,14.66 44.89,14.96 45.73,14.96 46.03,15.27 48.14,15.27 48.45,15.57 50.55,15.57 50.86,15.88 51.7,15.88 52.7,16.88 | v52.7,18.73 52.7,18.1
  Top 0.813: 52.7,18.1 52.7,16.88
  Bottom 0.152: v52.7,18.73 A9_P.TP
AIN1
  Top 0.152: U$17.AIN_0 26.27,29.15 26.71,28.7 26.86,28.7 U$20.6 27.11,28.06 25.84,28.06 25.24,27.46 0006.1 0007.2 C26.1
AIN3
  Top 0.152: U$17.AIN_2 26.61,32.28 26.73,32.28 27.37,31.63 27.37,30.89 27.5,30.76 28.13,30.76 29.27,29.61 29.27,28.84 29.41,28.7 29.56,28.7 U$20.1 30.79,28.26 31.58,29.05 | 31.58,29.05 C28.1 32.54,29 0005.2 | 31.58,29.05 31.54,29.26 | 0005.2 32.81,29.26 | 0004.1 0005.2
AIN5
  Top 0.152: U$29.AIN_2 43.6,32.12 43.71,32.12 43.97,31.86 43.97,28.52 44.19,28.29 44.19,27.72 44.61,27.3 U$31.1 45.49,27.4 45.64,27.4 46.13,27.89 46.13,28.14 C47.1 0017.2 0016.1
AIN6
  Top 0.152: U$29.AIN_0 43.25,30.83 43.36,30.73 43.36,30.22 42.98,29.85 C45.1 0019.2 41.49,27.26 0018.1 42.6,27.2 U$31.6
AIN7
  Top 0.152: U$29.AIN_1 43.35,31.73 43.66,31.42 43.66,30.1 43.11,29.54 43.04,29.54 42.94,29.45 | 42.94,29.45 U$31.4 | 42.94,29.45 42.94,29.11 43.89,28.17 43.89,27.59 44.55,26.93 C46.1 45.32,26.8 46,26.8 46.72,27.52 0021.2 0020.1
AIN9
  Top 0.152: U$32.AIN_2 5.55,32.54 5.94,32.54 6.16,32.77 6.85,32.77 7.02,32.94 8.1,32.94 | 8.1,32.94 8.16,32.94 | 8.1,32.94 8.15,32.88 8.21,32.88 9.59,31.51 9.59,31.06 10,30.65 10,30.48 U$33.1 11.06,29.74 C52.1 0023.2 11.11,27.88 0022.1
AIN10
  Top 0.152: U$32.AIN_0 4.42,32.18 4.42,30.77 4.71,30.48 6.35,30.48 | U$33.6 6.35,30.48 | 0024.1 0025.2 C50.1 6.41,30.42 6.35,30.48
AIN11
  Top 0.152: U$32.AIN_1 4.86,32.37 5.12,32.12 5.94,32.12 6.29,32.47 6.79,32.47 6.88,32.38 U$33.4 8.06,31.93 8.21,31.93 8.35,31.8 8.35,30.11 7.88,29.64 C51.1 0027.2 0026.1
EN_GATE_MID_1  (via drill 0.6)
  Top 0.152: v40.16,38.58 EN_GATE_MID_1.TP
  Top 0.813: EN_GATE_MID_1.TP 40.16,36.91 40.31,36.77
  Bottom 0.152: U$21.1-EN_GATE 41.59,36.51 40.16,37.94 v40.16,38.58
EN_GATE_MID_2  (via drill 0.6)
  Top 0.152: v21.59,38.58 EN_GATE_MID_2.TP
  Top 0.813: EN_GATE_MID_2.TP 21.59,36.66 21.42,36.5 21.42,36.23
  Bottom 0.152: U$3.1-EN_GATE 24.37,33.1 24.37,32.84 23.9,32.36 22.83,32.36 22.31,32.88 22.31,33.85 21.59,34.56 v21.59,38.58
EN_GATE_MID_3  (via drill 0.6)
  Top 0.152: v4.45,38.58 EN_GATE_MID_3.TP
  Top 0.813: EN_GATE_MID_3.TP 4.45,36.89 4.14,36.59
  Bottom 0.152: U$10.1-EN_GATE 7.3,33.94 6.69,34.55 6.69,35.69 4.45,37.94 v4.45,38.58
ENGATE_1  (via drill 0.6)
  Top 0.152: U1.44 21.67,7.77 21,8.45 17.24,8.45 10.73,14.96 5.99,14.96 4.45,16.51 | v4.45,18.73 4.45,18.1
  Top 0.813: 4.45,18.1 4.45,16.51
  Bottom 0.152: v4.45,18.73 ENGATE_1_P.TP
ENGATE_2  (via drill 0.35, 0.6)
  Top 0.152: U1.28 26.31,15.35 26.31,15.92 26.45,16.05 26.79,16.05 v27.09,16.36 | 21.59,18.1 v21.59,18.73
  Top 0.813: 21.59,16.67 21.59,18.1
  Bottom 0.152: v27.09,16.36 26.66,16.36 26.28,15.97 23.56,15.97 ENGATE_2_P.TP | 21.75,17.94 ENGATE_2_P.TP | v21.59,18.73 ENGATE_2_P.TP
ENGATE_3  (via drill 0.6)
  Top 0.152: U1.4 33.52,7.4 32.95,7.4 32.81,7.53 32.81,7.74 30.84,9.7 30.84,12.2 33.21,14.56 33.55,14.56 34.25,15.27 36.08,15.27 36.69,15.88 39,15.88 39.63,16.51 40.01,16.51 | 40.01,18.1 v40.01,18.73
  Top 0.813: 40.01,16.51 40.01,18.1
  Bottom 0.152: v40.01,18.73 ENGATE_3_P.TP
GH_ABOT_1  (via drill 0.6)
  Bottom 0.152: GH_ABOT_2.TP GH_ABOT_1.TP v1.91,19.84 | 7.3,25.24 U$10.36-GH_A 6.43,24.68 5.76,24 5.76,23.06 5.62,22.93 2.6,22.93 2.22,22.54 2.22,22.38 2.05,22.21
  Bottom 0.813: GH_ABOT_2.TP 1.91,22.07 2.05,22.21 2.05,22.54
GH_ABOT_2  (via drill 0.6)
  Bottom 0.152: U$3.36-GH_A 24.11,24.68 24.02,24.59 23.2,24.59 21.95,23.34 21.95,22.74 21.82,22.61 20.07,22.61 19.68,22.23 19.68,22.13 | v19.68,19.84 19.68,20.48 GH_ABOT_3.TP GH_ABOT_4.TP
  Bottom 0.813: GH_ABOT_4.TP 19.68,22.13 19.83,22.28
GH_ABOT_3  (via drill 0.6)
  Bottom 0.152: U$21.36-GH_A 40.74,24.68 40.65,24.59 40.1,24.59 39.09,23.58 39.09,22.74 38.96,22.61 37.69,22.61 37.47,22.38 37.47,22.35 | v37.47,19.84 GH_ABOT_6.TP GH_ABOT_5.TP
  Bottom 0.813: GH_ABOT_5.TP 37.47,22.35
GH_ATOP_1  (via drill 0.35, 0.6)
  Top 0.152: U$13.G 6.3,52.44 6.3,52.53 6.17,52.67 2.73,52.67 2.29,52.23 v2.29,51.12 | v1.91,39.69 GH_ATOP_1.TP
  Top 0.813: GH_ATOP_1.TP GH_ATOP_2.TP v1.91,42.26
  Bottom 0.152: v1.91,42.26 2.29,42.65 v2.29,51.12